# Altium PCB Fujin_Encoder.PcbDoc
Units mm, origin at the board's own origin, x right, y up, seen from the top; angles counter-clockwise.
Board outline 14.3 x 10 mm, 2 copper layers (Top Layer, Bottom Layer), stack 0.43 mm thick; 3 components, 8 nets, 24 pads, 8 vias.
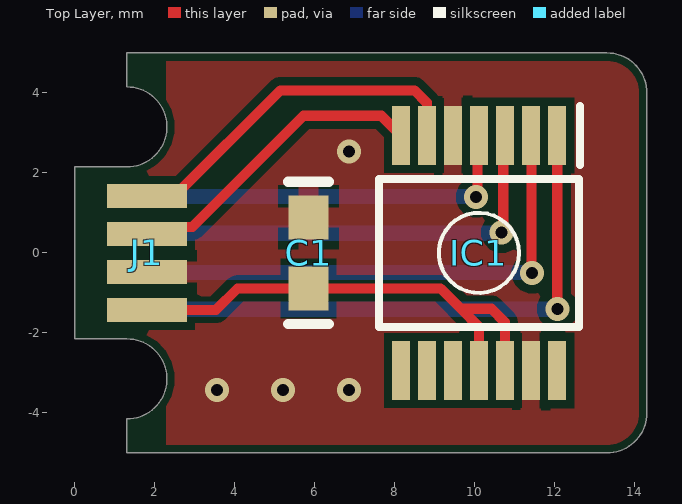
[diagram p0: Top Layer view]
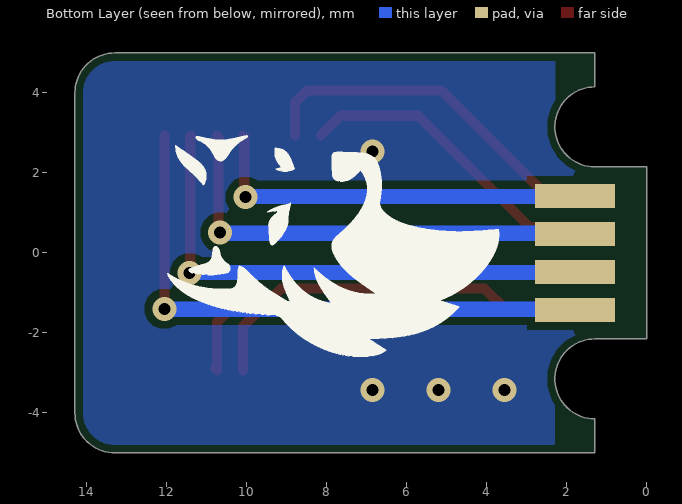
[diagram p1: Bottom Layer view, seen from below]

## Layer stack, top to bottom
Top Solder: solder mask 0.2104, Solder Resist, Dk 3.5
Top Layer: signal copper 0.0152
Dielectric 1: dielectric 0.4, FR-4, Dk 4.8
Bottom Layer: signal copper 0.0152
Bottom Solder: solder mask 0.2104, Solder Resist, Dk 3.5

## Board outline
1.3,-5 1.3,-4.15 ccw(c1.3,-3.15) 1.3,-2.15 0,-2.15 0,2.15 1.3,2.15 ccw(c1.3,3.15) 1.3,4.15 1.3,5 13.3,5 cw(c13.3,4) 14.3,4 14.3,-4 cw(c13.3,-4) 13.3,-5

## Design rules (kind name [scope] priority, off if disabled: settings)
BoardOutlineClearance [All] p1: gap=0.2 ignorepadtopadclearanceinfootprint=FALSE except(0.4: Arc-SplitBarrior Arc-SplitContinuation Track-SplitBarrior Track-SplitContinuation SMDPad-SplitBarrior SMDPad-SplitContinuation THPad-SplitBarrior THPad-SplitContinuation Via-SplitBarrior Via-SplitContinuation Fill-SplitBarrior Fill-SplitContinuation Poly-SplitBarrior Poly-SplitContinuation Region-SplitBarrior Region-SplitContinuation Text-SplitBarrior Text-SplitContinuation)
Clearance "Clearance Bottom Layer" [OnLayer('Bottom Layer')] p1: gap=0.203 ignorepadtopadclearanceinfootprint=TRUE except(0.254: Arc-Text Track-Text SMDPad-Text THPad-Text Via-Text Fill-Text Poly-Text Region-Text Text-Text)
Clearance "Clearance Top Layer" [OnLayer('Top Layer')] p2: gap=0.203 ignorepadtopadclearanceinfootprint=TRUE except(0.254: Arc-Text Track-Text SMDPad-Text THPad-Text Via-Text Fill-Text Poly-Text Region-Text Text-Text)
Clearance [All] p3: gap=0.2 ignorepadtopadclearanceinfootprint=FALSE except(0.089: Arc-Arc Arc-Track Arc-SMDPad Track-Track Track-SMDPad SMDPad-SMDPad; 0.127: Arc-Via Track-Via SMDPad-Via THPad-Via Via-Via; 0.254: Arc-Text Track-Text SMDPad-Text THPad-Text Via-Text Fill-Text Poly-Text Region-Text Text-Text)
HoleSize [All] p1: absolutevalues=TRUE maxlimit=6.3 minlimit=0.2 maxpercent=80.000 minpercent=20.000
MinimumAnnularRing [All] p1: minimumring=0.076
MinimumSolderMaskSliver [All] p1: minsoldermaskwidth=0.1
PolygonConnect PolygonConnect_1 [All] p1: thpad.connectstyle=Relief thpad.reliefconductorwidth=0.508 thpad.reliefentries=4 thpad.polygonreliefangle="90 Angle" thpad.airgapwidth=0.254 smdpad.connectstyle=Relief smdpad.reliefconductorwidth=0.508 smdpad.reliefentries=4 smdpad.polygonreliefangle="90 Angle" smdpad.airgapwidth=0.254 via.connectstyle=Direct via.reliefconductorwidth=0.508 via.reliefentries=4 via.polygonreliefangle="90 Angle" via.airgapwidth=0.254
RoutingCorners [All] p1: cornerstyle=Round minsetback=2.54 maxsetback=2.54
RoutingVias [All] p1: holewidth=0.5 width=1 viastyle="Through Hole" minholewidth=0.2 minwidth=0.45 maxholewidth=1 maxwidth=2
SilkToSilkClearance [All] p1: silktosilkclearance=0.1
SilkToSolderMaskClearance [IsPad] p1: minsilkscreentomaskgap=0.1 clearancetoexposedcopper=TRUE
SolderMaskExpansion [All] p1: expansion=0.102 istentingtop=FALSE
Width [All] p1: maxlimit=2.54 minlimit=0.089 preferedwidth=0.381
25 further rules are at their usual default settings.

## Components (designator, comment, footprint, x,y, rotation, side; value= is the part's Value field where it differs from the comment)
C1 "100nF" Capacitor-0603 5.842,0 r270 top
IC1 "AS5047P-ATSM" SOP65P640X120-14N 10.1,0 r270 top
J1 "ENCODER_CONNECTOR" ENCODER_CONN 1.8,0 r0 top

## Footprints (in the part's own frame and the unit in brackets; to place one, negate y for a bottom-side part, rotate by r counter-clockwise, add the part's x,y. Pads: shape width x height; smd on the part's side, far side on the other; paste and mask are expansions set on the pad)
Capacitor-0603 [mm] "Chip Capacitor; Body 1.6 x 0.8 mm (LxW typ)"
  rect 1.1x1 smd: 1(-0.889,0) 2(0.889,0)
  silkscreen extent -1.78,-0.51 1.78,0.51, body extent -1.27,-0.51 1.33,0.49, height 0.89
ENCODER_CONN [mm]
  rect 2x0.6 smd far side: 1(0,-1.425) 2(0,-0.475) 3(0,0.475) 4(0,1.425)
  rect 2x0.6 smd: 5(0,-1.425) 6(0,-0.475) 7(0,0.475) 8(0,1.425)
SOP65P640X120-14N [mm]
  rect 1.475x0.45 smd: 1(-2.938,1.95) 2(-2.938,1.3) 3(-2.938,0.65) 4(-2.938,0) 5(-2.938,-0.65) 6(-2.938,-1.3) 7(-2.938,-1.95) 8(2.938,-1.95) 9(2.938,-1.3) 10(2.938,-0.65) 11(2.938,0) 12(2.938,0.65) 13(2.938,1.3) 14(2.938,1.95)
  silkscreen extent -3.67,-2.5 1.85,2.52, body extent -3.2,-2.5 3.2,2.5, height 1.2

## Part data
C1: library part "CAP 100NF 50V", "Capacitor Cer 100nF 50V", Capacitance=0.1uF, Capacitance Tolerance="+80%, -20%", Capacitor Terminals="Radial Leaded", Dielectric Characteristic=Y5, Manufacturer=-, Manufacturer Part Number=IMP14925, Operating Temperature Max=85, Operating Temperature Min=-25, Operating Temperature Range="-25°C to +85°C<!--FANDB--><div class=\"features-and-benefits-container\"><div class=\"features-and-benefits-description\"><span class=\"features-benefits-value\">The MCFY series from Multicomp are radial leaded ceramic disc capacitors. The capacitance values ranges from 6800pF to 0.22?F.</span></div><div class=\"features-and-benefits-list\"><ul class=\"features-and-benefits-list-list\"><li class=\"features-and-benefits-list-item\">Large capacitance in small size</li><li class=\"features-and-benefits-list-item\">Rated voltage of 50V</li><li class=\"features-and-benefits-list-item\">80%/-20% tolerance</li><li class=\"features-and-benefits-list-item\">Operating temperature range -25°C to +85", Supplier Part Number 1="Capacitor Cerâmico Disco 100Kpf/50V (104/100K/100nF/0.1uF) cód. 1351", Voltage Rating=50, Capacitance Tolerance ±="+80%, -20%", ComponentLink1Description=http://loja.multcomercial.com.br/capacitor-ceramico-disco-100kpf-50v-104-100k-100nf-0-1uf-cod-1351.html, ComponentLink1URL=http://loja.multcomercial.com.br/capacitor-ceramico-disco-100kpf-50v-104-100k-100nf-0-1uf-cod-1351.html, Lead Spacing=5, Packaging=Each, Pricing 1="1=0.10 (BRL)", Product Range="MCFY Series", RoHS=YES, Stock 1=115809, Supplier 1="Mult Comercial", SVHC="No SVHC (15-Jun-2015)"
IC1: "Integrated Circuit", Manufacturer_Name="ams OSRAM", Mouser Part Number=985-AS5047P-ATSM, Arrow Part Number=AS5047P-ATSM, Arrow Price/Stock=https://www.arrow.com/en/products/as5047p-atsm/ams-osram?region=nac, Datasheet Link=https://datasheet.datasheetarchive.com/originals/distributors/DKDS-7/120640.pdf, Height=1.2mm, Manufacturer_Part_Number=AS5047P-ATSM, Mouser Price/Stock=https://www.mouser.co.uk/ProductDetail/ams-OSRAM/AS5047P-ATSM?qs=cGEy3R83DS8fzNOVLHtOgg%3D%3D

## Via types
v1: diameter 0.6, hole 0.3, Top Layer to Bottom Layer, tented both sides, 8 vias

## Nets (pads, with @x,y where several pads share a name; then routed paths per layer and width w, separated by ;. In a path a pad name is that pad's centre, name@x,y a point inside that pad or via, vN(x,y) a via of type N, cw(c..) or ccw(c..) an arc to the next point about the centre after c; other vN are vias at no path point)
3V3: C1.2 IC1.11 IC1.12 J1.5 | length 12.5
  Top Layer w0.254: J1.5 3.528,-1.425 4.064,-0.889 5.969,-0.889 9.144,-0.889 9.652,-1.397 ; IC1.11 10.1,-1.845 9.652,-1.397 ; IC1.12@10.795,-2.893 IC1.12 10.75,-1.733 10.414,-1.397 9.652,-1.397
CLK: IC1.2 J1.2 | length 13.9
  Top Layer w0.254: IC1.2 11.415,2.923 11.415,-0.493 v1(11.43,-0.508)
  Bottom Layer w0.254: J1.2 J1.2@1.816,-0.492 ; v1@11.414,-0.492 v1(11.43,-0.508)
  Bottom Layer w0.381: J1.2@1.016,-0.475 J1.2 ; J1.2@1.816,-0.492 v1@11.414,-0.492
CS: IC1.1 J1.1 | length 14.6
  Top Layer w0.254: IC1.1@12.06,2.928 12.06,-1.392 v1(12.065,-1.397)
  Bottom Layer w0.381: J1.1 1.814,-1.411 12.051,-1.411 v1(12.065,-1.397)
ENC_A: IC1.7 J1.7 | length 7.8
  Top Layer w0.254: J1.7 1.973,0.648 2.934,0.648 5.715,3.429 7.659,3.429 IC1.7
ENC_B: IC1.6 J1.8 | length 9
  Top Layer w0.254: J1.8 2.5,1.425 5.139,4.064 8.489,4.064 8.8,3.753 IC1.6
GND: C1.1 IC1.5 IC1.13 J1.6
  other v1: 3.556,-3.429 5.207,-3.429 6.858,-3.429 6.858,2.54
MISO: IC1.3 J1.3 | length 11.3
  Top Layer w0.254: v1(10.668,0.508) 10.709,0.549 10.709,2.897 IC1.3
  Bottom Layer w0.254: J1.3 J1.3@1.816,0.492 ; v1@10.652,0.492 v1(10.668,0.508)
  Bottom Layer w0.381: J1.3@1.816,0.492 v1@10.652,0.492
MOSI: IC1.4 J1.4 | length 9.8
  Top Layer w0.254: v1(10.033,1.397) 10.067,1.431 10.067,2.905 IC1.4
  Bottom Layer w0.254: J1.4 J1.4@1.814,1.411 ; v1@10.019,1.411 v1(10.033,1.397)
  Bottom Layer w0.381: J1.4@1.814,1.411 v1@10.019,1.411
pads on no net: IC1.8 IC1.9 IC1.10 IC1.14

## Polygon pours and split planes (outlines as drawn)
GND on Top Layer "GND_L01_P000" (solid, pour order 0): 2.286,-5 2.286,-3.317 ccw(c1.3,-3.15) 1.3,-2.15 0,-2.15 0,2.15 1.3,2.15 ccw(c1.3,3.15) 2.286,3.317 2.286,5 13.3,5 cw(c13.3,4) 14.3,4 14.3,-4 cw(c13.3,-4) 13.3,-5
GND on Bottom Layer "GND_L02_P001" (solid, pour order 1): 0,-2.15 0,2.15 1.3,2.15 ccw(c1.3,3.15) 2.286,3.317 2.286,5 13.3,5 cw(c13.3,4) 14.3,4 14.3,-4 cw(c13.3,-4) 13.3,-5 2.3,-5 2.3,-3.15 ccw(c1.3,-3.15) 1.3,-2.15

## Silkscreen, mask and mechanical layers (free items; w line width, h text height)
Top Overlay:
  circle w0.1: c10.1,0 r1.003
Bottom Overlay:
  drawing of 6 lines, arcs and shapes, not listed
Mechanical 1:
  the board outline again, w0.1